# Altium PCB Mosfet_Card.PcbDoc
Units mm, origin at the board's own origin, x right, y up, seen from the top; angles counter-clockwise.
Board outline 46 x 70 mm, 4 copper layers (Top Layer, Layer 1, Layer 2, Bottom Layer), stack 0.603 mm thick; 62 components, 32 nets, 143 pads, 508 vias.
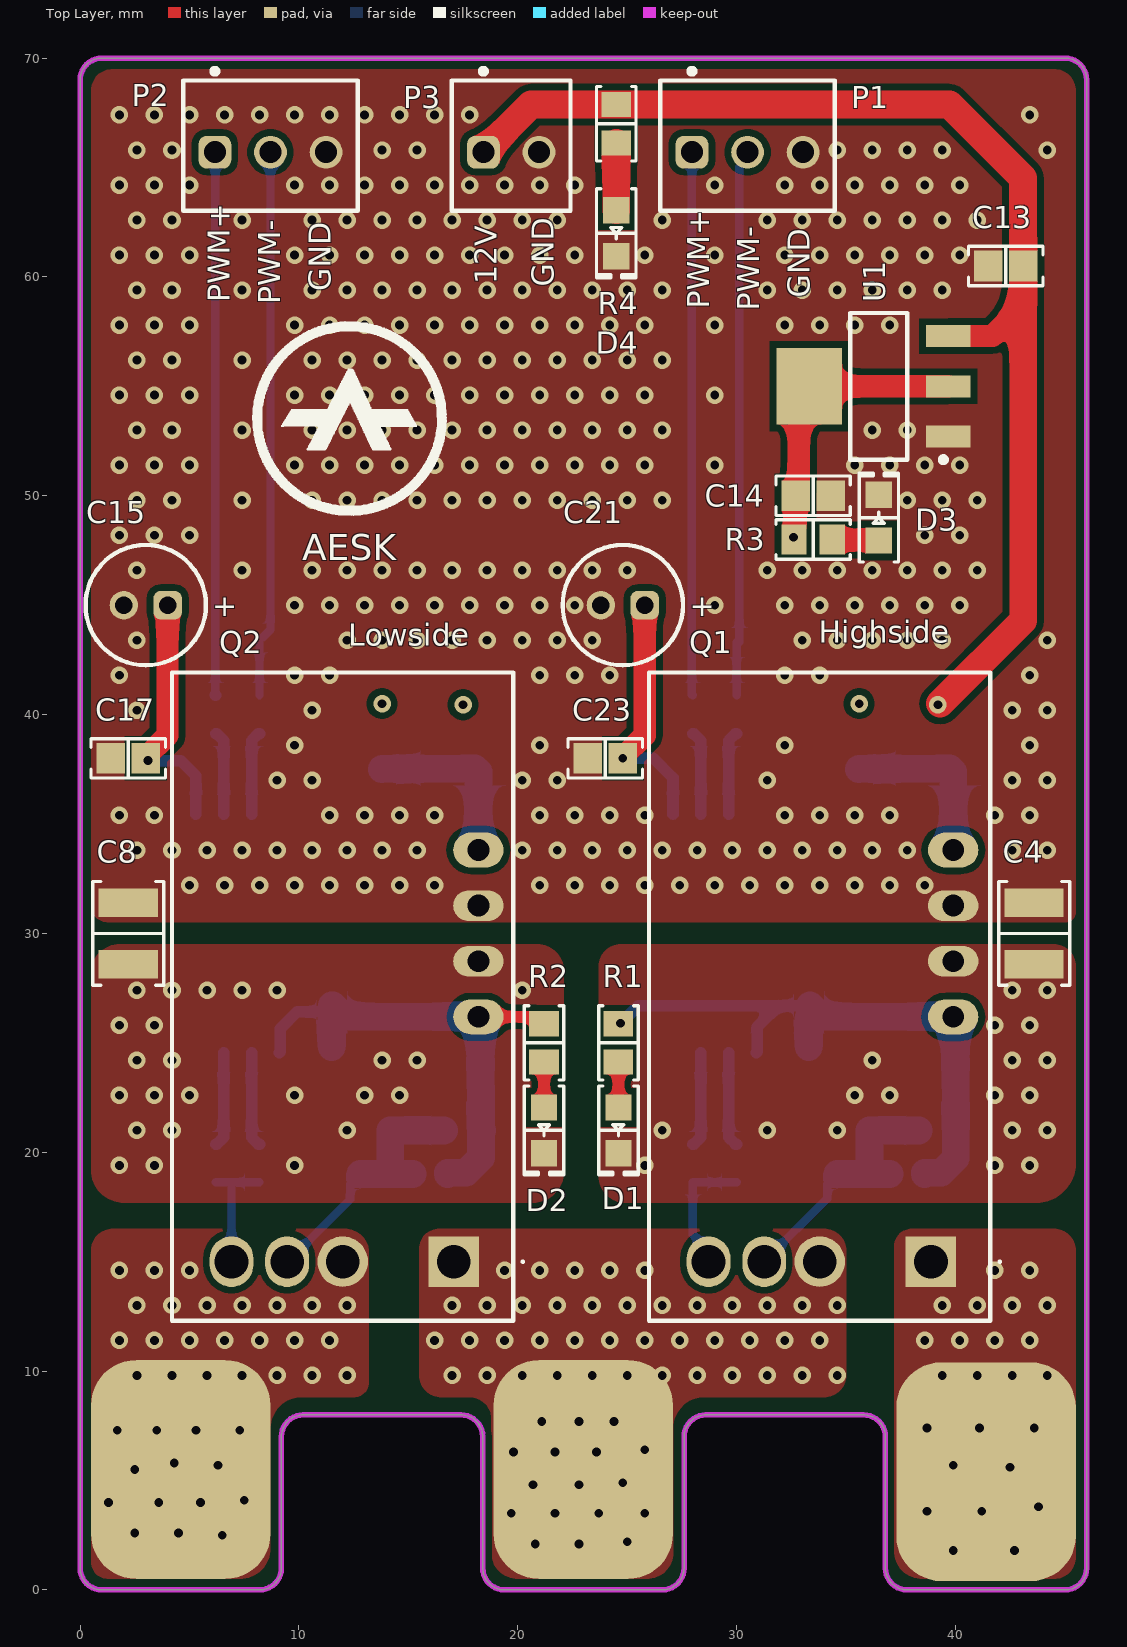
[diagram p0: Top Layer view]
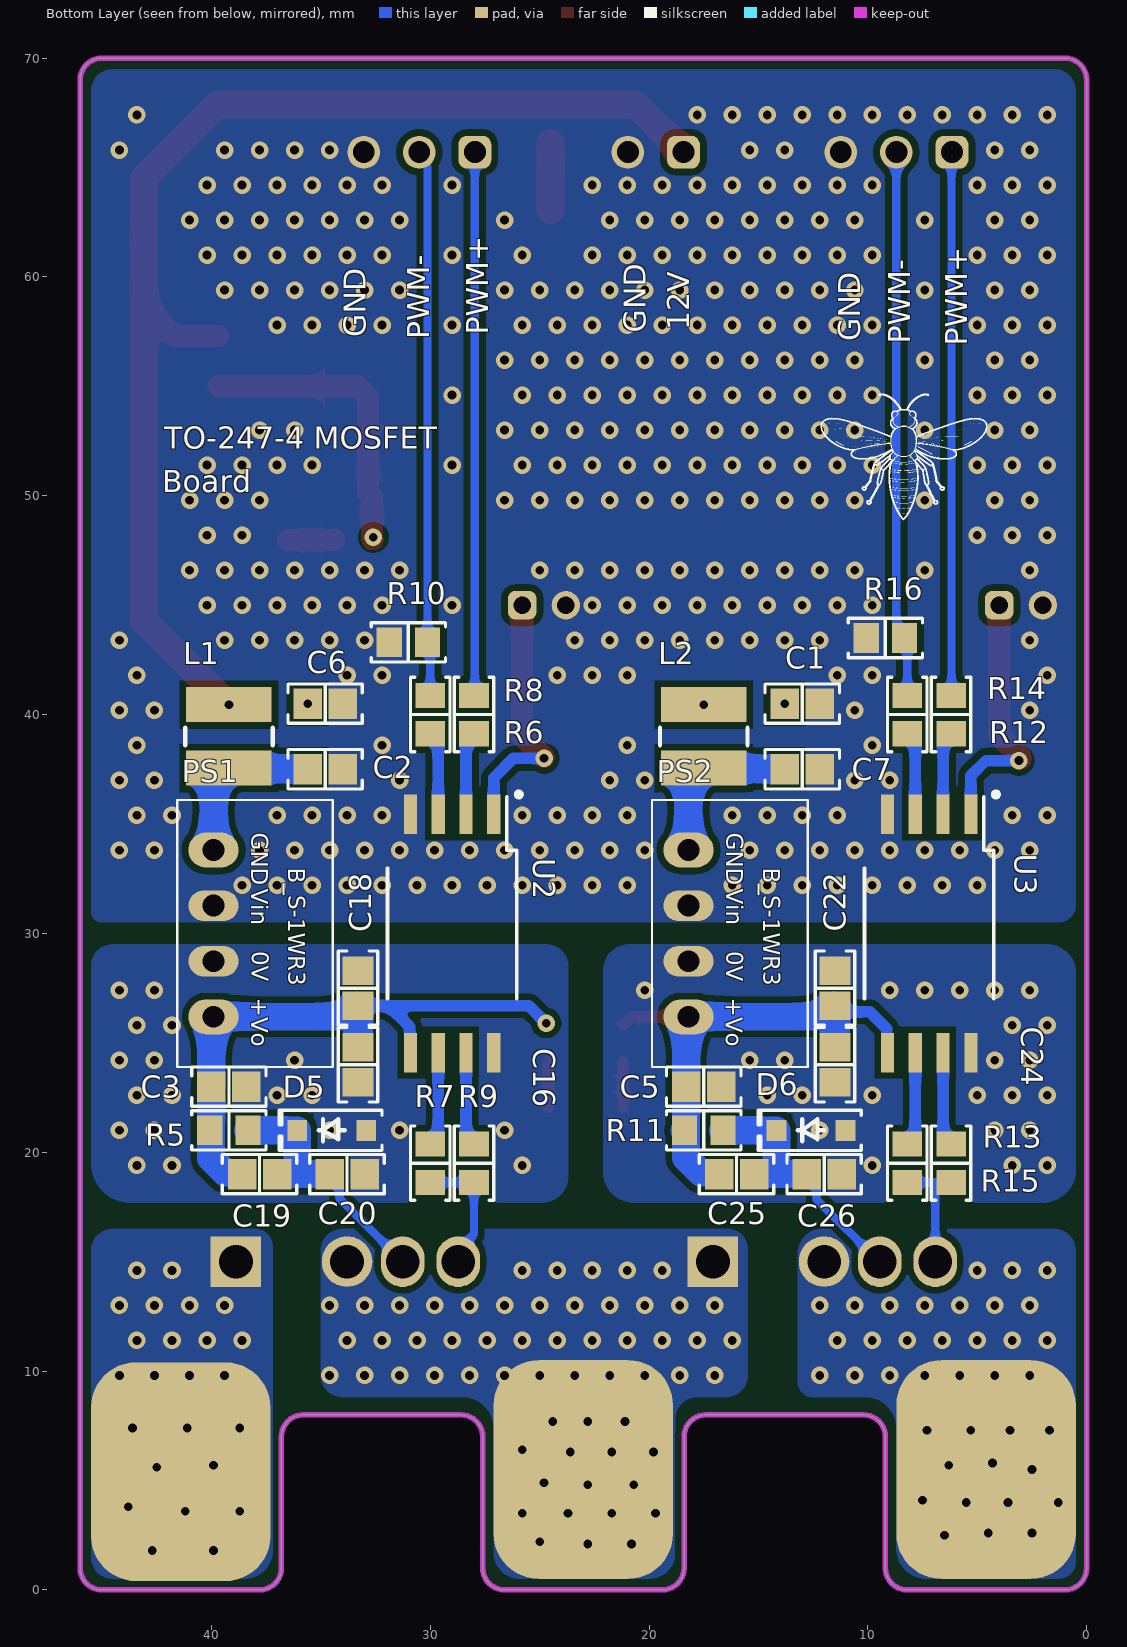
[diagram p1: Bottom Layer view, seen from below]
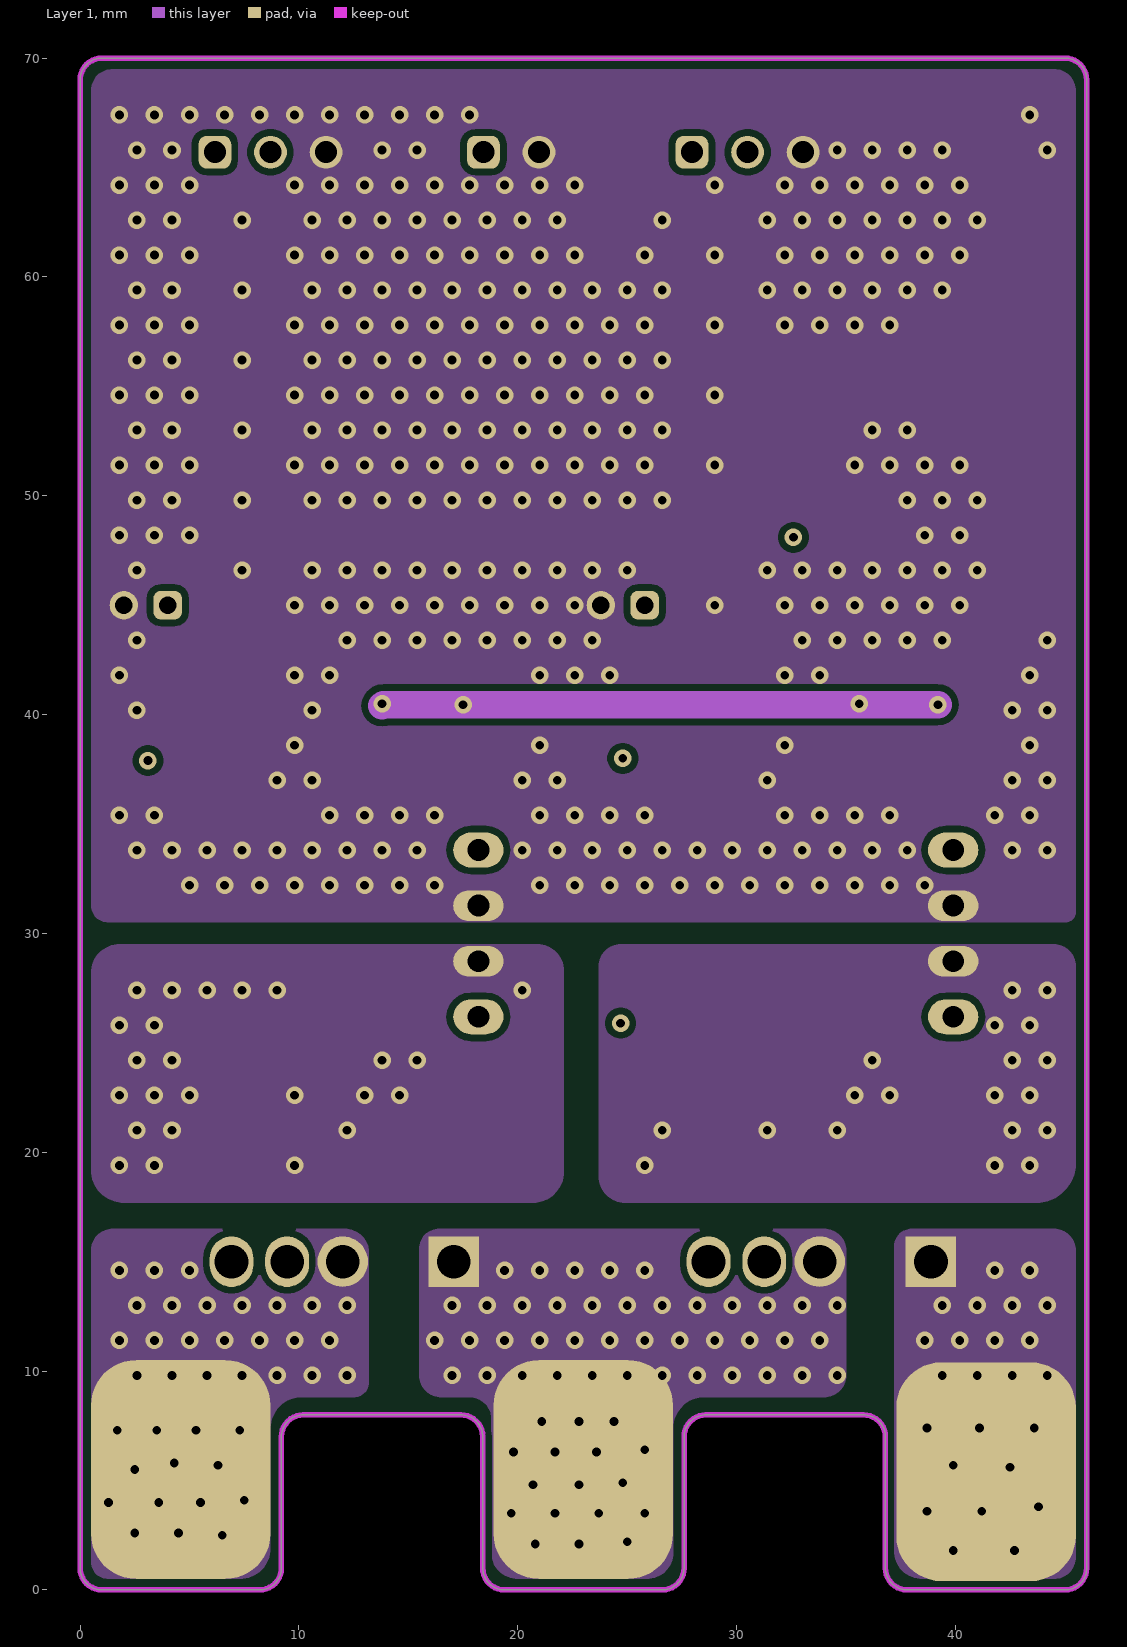
[diagram p2: Layer 1]
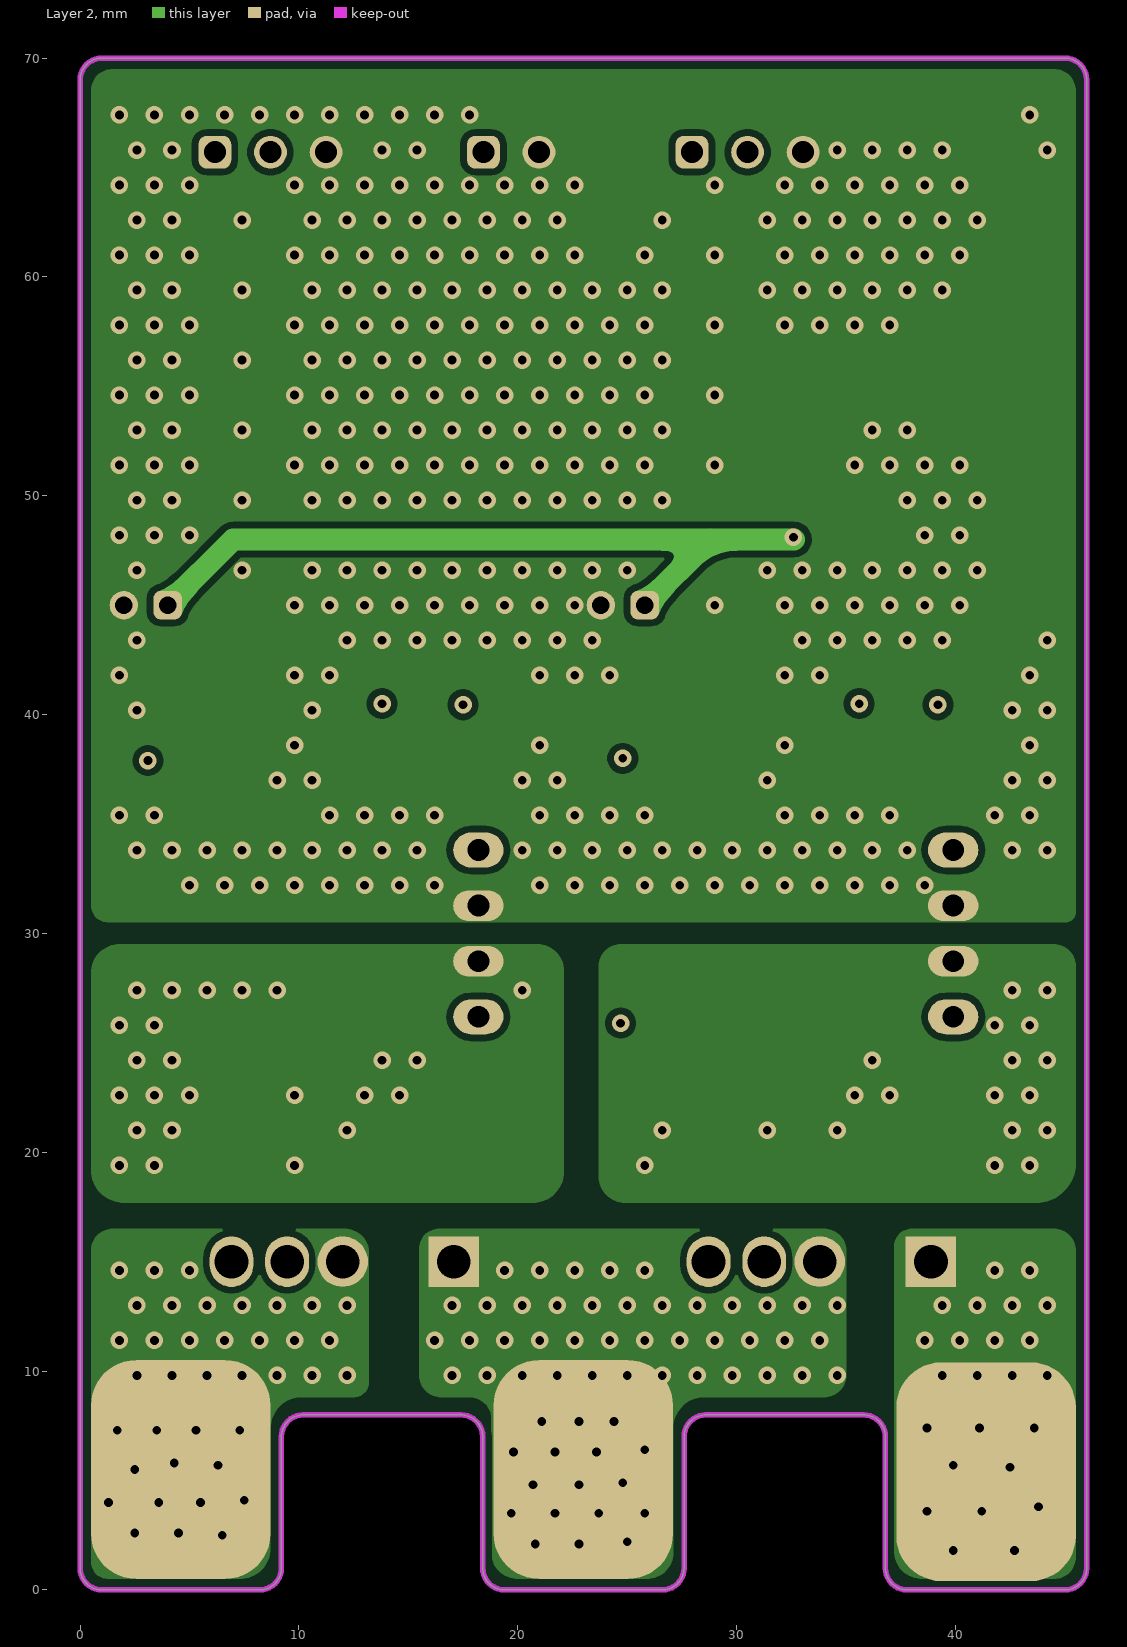
[diagram p3: Layer 2]

## Layer stack, top to bottom
Top Solder: solder mask 0.0102, Solder Resist, Dk 3.5
Top Layer: signal copper 0.0356
Dielectric 2: prepreg 0.0711, PP-006, Dk 4.1
Layer 1: signal copper 0.035
Dielectric 1: dielectric 0.32, FR-4, Dk 4.8
Layer 2: signal copper 0.035
Dielectric 3: prepreg 0.0711, PP-006, Dk 4.1
Bottom Layer: signal copper 0.0356
Bottom Solder: solder mask 0.0102, Solder Resist, Dk 3.5

## Board outline
1,0 8.2,0 ccw(c8.2,1) 9.2,1 9.2,7 cw(c10.2,7) 10.2,8 17.4,8 cw(c17.4,7) 18.4,7 18.4,1 ccw(c19.4,1) 19.4,0 26.6,0 ccw(c26.6,1) 27.6,1 27.6,7 cw(c28.6,7) 28.6,8 35.8,8 cw(c35.8,7) 36.8,7 36.8,1 ccw(c37.8,1) 37.8,0 45,0 ccw(c45,1) 46,1 46,69 ccw(c45,69) 45,70 1,70 ccw(c1,69) 0,69 0,1 ccw(c1,1)

## Design rules (kind name [scope] priority, off if disabled: settings)
BoardOutlineClearance [All] p1: gap=0.2 ignorepadtopadclearanceinfootprint=FALSE
Clearance Clearance_4 [InNet('GNDPWR')] p1: gap=0.3 ignorepadtopadclearanceinfootprint=FALSE
Clearance Clearance_3 [InNet('SW')] p2: gap=0.3 ignorepadtopadclearanceinfootprint=FALSE
Clearance Clearance_2 [InNet('GND_Lowside')] p3: gap=0.3 ignorepadtopadclearanceinfootprint=FALSE
Clearance Clearance_1 [InNet('GND_Highside')] p4: gap=0.3 ignorepadtopadclearanceinfootprint=FALSE
Clearance [InNet('GND')] p5: gap=0.3 ignorepadtopadclearanceinfootprint=FALSE
ComponentClearance [All] p1: gap=0.102 collisioncheckmode=3 verticalgap=0.102 showdistances=TRUE
DiffPairsRouting [All] p1: maxlimit=0.102 minlimit=0.102 mostfreqgap=0.102 toplayer_minwidth=0.102 toplayer_maxwidth=1816.048 toplayer_prefwidth=0.102 midlayer1_minwidth=0.102 midlayer1_maxwidth=1816.048 midlayer1_prefwidth=0.102 midlayer2_minwidth=0.102 midlayer2_maxwidth=1816.048 midlayer2_prefwidth=0.102 bottomlayer_minwidth=0.102 bottomlayer_maxwidth=1816.048 bottomlayer_prefwidth=0.102 maxuncoupledlength=12.7
Height [All] p1: minheight=0 maxheight=1816.048 prefheight=12.7
HoleSize [All] p1: absolutevalues=TRUE maxlimit=6.3 minlimit=0.2 maxpercent=80.000 minpercent=20.000
HoleToHoleClearance [All] p1: gap=0.25 allowstackedmicrovias=FALSE
MinimumAnnularRing [All] p1: minimumring=0.076
MinimumSolderMaskSliver [All] p1: minsoldermaskwidth=0
PlaneClearance [All] p1: clearance=0.102
PlaneConnect PlaneConnectPowerPads [InPadClass('PowerPads')] p1: planeconnectstyle=Direct reliefexpansion=0.508 reliefentries=4 reliefconductorwidth=0.254 reliefairgap=0.254
PlaneConnect [All] p2: pad.planeconnectstyle=Relief pad.reliefexpansion=0.3 pad.reliefentries=4 pad.reliefconductorwidth=0.102 pad.reliefairgap=0.102 via.planeconnectstyle=Direct via.reliefexpansion=0.3 via.reliefentries=4 via.reliefconductorwidth=0.127 via.reliefairgap=0.127
PolygonConnect PolygonConnectPowerPads [All vs (InPadClass('PowerPads'))] p1: connectstyle=Direct reliefconductorwidth=0.254 reliefentries=4 polygonreliefangle="90 Angle" airgapwidth=0.254
PolygonConnect [All] p2: connectstyle=Direct reliefconductorwidth=0.102 reliefentries=4 polygonreliefangle="90 Angle" airgapwidth=0.102
RoutingVias [All] p1: holewidth=0.2 width=0.45 viastyle="Through Hole" minholewidth=0.2 minwidth=0.45 maxholewidth=6.3 maxwidth=6.55
SilkToSilkClearance [All] p1: silktosilkclearance=0
SilkToSolderMaskClearance [IsPad] p1: minsilkscreentomaskgap=0.102 clearancetoexposedcopper=TRUE
SolderMaskExpansion [All] p1: expansion=0.075 istentingtop=FALSE
Width [All] p1: maxlimit=1816.048 minlimit=0.102 preferedwidth=0.102
20 further rules are at their usual default settings.

## Classes and differential pairs
component class U_Power: C1 C2 C3 C4 C5 C6 C7 C8 C13 C14 D1 D2 D3 D4 L1 L2 PS1 PS2 Q1 Q2 R1 R2 R3 R4 U1
component class U_Gate_Drive: C15 C16 C17 C18 C19 C20 C21 C22 C23 C24 C25 C26 D5 D6 R5 R6 R7 R8 R9 R10 R11 R12 R13 R14 R15 R16 U2 U3
component class U_Connector-Harness: H1 H2 MP1 MP2 MP3 MP4 P1 P2 P3

## Components (designator, comment, footprint, x,y, rotation, side; value= is the part's Value field where it differs from the comment)
C1 "4.7 µF" "CAP 0805_2012" 13,40.5 r0 bottom
C2 "4.7 µF" "CAP 0805_2012" 34.8,37.5 r0 bottom
C3 "1 µF" "CAP 0805_2012" 39.2,23 r0 bottom
C4 "1000pF" "CAP 1210_3225 - 1.8MM" 43.6,30 r270 top
C5 "1 µF" "CAP 0805_2012" 17.5,23 r0 bottom
C6 "4.7 µF" "CAP 0805_2012" 34.8,40.5 r0 bottom
C7 "4.7 µF" "CAP 0805_2012" 13,37.5 r0 bottom
C8 "1000pF" "CAP 1210_3225 - 1.8MM" 2.2,30 r270 top
C13 "10 µF" "CAP 0805_2012" 42.3,60.5 r0 top
C14 "100 µF" "CAP 0805_2012" 33.5,50 r180 top
C15 "1uF" WCAP-ATG5_D5H11 3,45 r0 top
C16 "0.22 µF" "CAP 0805_2012" 33.3,24 r270 bottom
C17 "0.1 µF" "CAP 0805_2012" 2.2,38 r180 top
C18 "10 µF" "CAP 0805_2012" 33.3,27.5 r270 bottom
C19 "10 µF" "CAP 0805_2012" 37.8,19 r0 bottom
C20 "4.7 µF" "CAP 0805_2012" 33.8,19 r0 bottom
C21 "1uF" WCAP-ATG5_D5H11 24.8,45 r0 top
C22 "0.22 µF" "CAP 0805_2012" 11.5,27.5 r90 bottom
C23 "0.1 µF" "CAP 0805_2012" 24,38 r180 top
C24 "10 µF" "CAP 0805_2012" 11.5,24 r90 bottom
C25 "10 µF" "CAP 0805_2012" 16,19 r0 bottom
C26 "4.7 µF" "CAP 0805_2012" 12,19 r0 bottom
D1 "Green" "LED 0805_2012 GREEN" 24.6,21 r270 top
D2 "Green" "LED 0805_2012 GREEN" 21.2,21 r270 top
D3 "Green" "LED 0805_2012 GREEN" 36.5,49 r90 top
D4 "Green" "LED 0805_2012 GREEN" 24.5,62 r270 top
D5 "SZMMSZ3V3T1G" SOD-123 34.5,21 r0 bottom
D6 "SZMMSZ3V3T1G" SOD-123 12.6,21 r0 bottom
H1 "TO-247_Heatsink" Heatsink 115.8,137 r0 top
H2 "TO-247_Heatsink" Heatsink 73.9,136.7 r0 top
L1 "6.8 µH" "TDK VLCF4024-2" 39.2,39 r270 bottom
L2 "6.8 µH" "TDK VLCF4024-2" 17.5,39 r270 bottom
MP1 "Hole 3.3mm x 9mm" 78614090960 86.284,113.157 r0 top
MP2 "Hole 3.3mm x 9mm" 78614090960 77.267,113.157 r0 top
MP3 "Hole 3.3mm x 9mm" 78614090960 60.122,113.157 r0 top
MP4 "Hole 3.3mm x 9mm" 78614090960 50.978,113.157 r0 top
P1 "61900311121" 61900311121 30.5,66 r180 top
P2 "61900311121" 61900311121 8.7,66 r180 top
P3 "61900211121" 61900211121 19.7,66 r180 top
PS1 "B_S-1WR3" B_S-1WR3 39.9,30 r270 bottom
PS2 "B_S-1WR3" B_S-1WR3 18.2,30 r270 bottom
Q1 "NTH4L015N065SC1" NTH4L015N065SC1 33.8,15 r0 top
Q2 "NTH4L015N065SC1" NTH4L015N065SC1 12,15 r0 top
R1 "1.2 kOhms" "RES 0805_2012" 24.6,25 r270 top
R2 "1.2 kOhms" "RES 0805_2012" 21.2,25 r270 top
R3 "330 Ohms" "RES 0805_2012" 33.5,48 r0 top
R4 "1 kOhms" "RES 0805_2012" 24.5,67 r90 top
R5 "3.3 kOhms" "RES 0805_2012" 39.2,21 r0 bottom
R6 "56 Ohms" "RES 0805_2012" 28,40 r270 bottom
R7 "10 Ohms" "RES 0805_2012" 30,19.5 r270 bottom
R8 "56 Ohms" "RES 0805_2012" 30,40 r270 bottom
R9 "10 Ohms" "RES 0805_2012" 28,19.5 r270 bottom
R10 "0 Ohms" "RES 0805_2012" 31,43.3 r0 bottom
R11 "3.3 kOhms" "RES 0805_2012" 17.5,21 r0 bottom
R12 "56 Ohms" "RES 0805_2012" 6.2,40 r270 bottom
R13 "10 Ohms" "RES 0805_2012" 8.2,19.5 r270 bottom
R14 "56 Ohms" "RES 0805_2012" 8.2,40 r270 bottom
R15 "10 Ohms" "RES 0805_2012" 6.2,19.5 r270 bottom
R16 "0 Ohms" "RES 0805_2012" 9.2,43.5 r0 bottom
U1 "LM1117IMP-3.3/NOPB" DCY0004A_M 36.5,55 r180 top
U2 "UCC5320SCDWV" DWV0008A 29,30 r270 bottom
U3 "UCC5320SCDWV" DWV0008A 7.2,30 r270 bottom

## Footprints (in the part's own frame and the unit in brackets; to place one, negate y for a bottom-side part, rotate by r counter-clockwise, add the part's x,y. Pads: shape width x height; smd on the part's side, far side on the other; paste and mask are expansions set on the pad)
61900211121 [mm] "2.54mm Male Locking Header, 2p"
  rrect50% 1.5x1.5 hole 1: 1(1.27,0.3)
  round 1.5 hole 1: 2(-1.27,0.3)
  silkscreen extent -2.71,-3.52 2.71,2.98, body extent -2.54,-2.9 2.54,2.9, height 11.53
61900311121 [mm] "2.54mm Male Locking Header, 3p"
  rrect50% 1.5x1.5 hole 1: 1(2.54,0.3)
  round 1.5 hole 1: 2(0,0.3) 3(-2.54,0.3)
  silkscreen extent -3.98,-3.52 3.98,2.98, body extent -3.81,-2.9 3.81,2.9, height 11.53
78614090960 [mm] "SMT Steel Spacer Internal hole diameter 3.3mm non stop, height 9mm"
  round 7.4 / inner round 0 / far side round 0 hole 4.4 unplated: 1(0,0)
  body extent -3,-3 3,3, height 9
B_S-1WR3 [mm]
  oval 1.6x2.3 hole 1: 1(-3.81,0) 4(3.81,0)
  oval 1.4x2.3 hole 1: 2(-1.27,0) 3(1.27,0)
  silkscreen extent -6.1,-1.66 6.1,5.45, body extent -5.81,-0.88 5.79,5.12, height 13.5
"CAP 0805_2012" [mm] "Chip Capacitor, 2-Leads, Body 2.00x1.20mm, IPC Medium Density"
  rect 1.3x1.4 smd: 1(-0.8,0) 2(0.8,0)
  silkscreen extent -1.7,-0.9 1.7,0.9, body extent -1,-0.64 1,0.64, height 1.26
"CAP 1210_3225 - 1.8MM" [mm] "Chip Capacitor, 2-Leads, Body 3.20x2.50mm, IPC Medium Density"
  rect 1.3x2.7 smd: 1(-1.4,0) 2(1.4,0)
  silkscreen extent -2.37,-1.63 2.37,1.63, body extent -1.6,-1.25 1.6,1.25, height 1.8
DCY0004A_M [mm]
  rect 2.05x1 smd paste+0 mask+0.051: 1(-3.175,2.3) 2(-3.175,0) 3(-3.175,-2.3)
  rect 3x3.5 smd paste+0 mask+0.051: 4(3.175,0)
  silkscreen extent -3.08,-3.35 1.3,3.47, body extent -3.5,-3.25 3.5,3.25, height 1.78
DWV0008A [mm]
  rect 1.8x0.6 smd paste+0 mask+0.051: 1(-5.45,1.905) 2(-5.45,0.635) 3(-5.45,-0.635) 4(-5.45,-1.905) 5(5.45,-1.905) 6(5.45,-0.635) 7(5.45,0.635) 8(5.45,1.905)
  silkscreen extent -6.53,-2.95 2.98,3.23, body extent -5.77,-2.93 5.77,2.93, height 2.72
Heatsink [mm]
  body extent -17.6,-3.6 17.6,38, height 11
"LED 0805_2012 GREEN" [mm] "Chip Diode, 2-Leads, Body 2.00x1.25mm, IPC Medium Density"
  rect 1.2x1.2 smd: 1(-1.05,0) 2(1.05,0)
  silkscreen extent -2.03,-0.9 2.03,0.9, body extent -1,-0.62 1,0.63, height 0.9
NTH4L015N065SC1 [mm]
  rect 2.31x2.31 hole 1.54: 1(5.08,0)
  round 2.31 hole 1.54: 2(0,0)
  oval 2x2.31 hole 1.54: 3(-2.54,0) 4(-5.08,0)
  silkscreen extent -7.8,-2.7 8.28,26.92, body extent -7.9,-0.25 7.9,26.87, height 5.7
"RES 0805_2012" [mm] "Chip Resistor, 2-Leads, Body 2.00x1.25mm, IPC Medium Density"
  rect 1.15x1.35 smd: 1(-0.875,0) 2(0.875,0)
  silkscreen extent -1.7,-0.9 1.7,0.9, body extent -1,-0.62 1,0.63, height 0.6
SOD-123 [mm] "SOD, 2-Leads, Body 1.55x3.70mm, IPC Medium Density"
  rect 0.9x0.95 smd: 1(-1.575,0) 2(1.575,0)
  silkscreen extent -2.3,-0.92 2.41,0.92, body extent -1.86,-0.78 1.86,0.77, height 1.35
"TDK VLCF4024-2" [mm] "Precision Wire Wound Inductor, 2-Leads, Body 4.00x4.00mm, IPC Medium Density"
  rect 1.6x3.9 smd: 1(-1.45,0) 2(1.45,0)
  silkscreen extent -0.4,-2 0.4,2, body extent -2.05,-2 2.05,2, height 2.4
WCAP-ATG5_D5H11 [mm] "Aluminum Electrolytic Capacitors, 5x11mm"
  rrect50% 1.3x1.3 hole 0.8: 1(1,0)
  round 1.3 hole 0.8: 2(-1,0)
  silkscreen extent -2.75,-2.75 2.75,2.75, body extent -2.49,-2.5 2.5,2.5, height 11.31

## Part data
C1 C2 C6 C7 C20 C26: library part VJ0805V475ZXQTW1BC, "CAP CER 4.7UF 10V Y5V 0805", Device Package="0805 (2012 Metric)", manufacturer="Vishay Vitramon", Operating Temperature="-25°C ~ 85°C", Supplier Part Number 1=720-1738-1-ND, Temperature Coefficient="Y5V (F)", Tolerance="-20%, +80%", Voltage - Rated=10V, Applications="General Purpose", Capacitance="4.7 µF", componentlink1description=Datasheet, componentlink1url=https://www.vishay.com/docs/28548/vjw1bcbascomseries.pdf, componentlink2description="DigiKey Link", componentlink2url=https://www.digikey.com/en/products/detail/vishay-vitramon/VJ0805V475ZXQTW1BC/8310746, lastupdated="9.02.2024 20:15:54", Lifecycle Status=Active, Minimum Order=1, Mounting Type="Surface Mount, MLCC", Package / Case="0805 (2012 Metric)", packaging=TapeAndReel, Part Number=VJ0805V475ZXQTW1BC, Part Status=Active, partid=7977, price=0.06, series=VJ, Size / Dimension="0.079\" L x 0.049\" W (2.00mm x 1.25mm)", Supplier 1=DigiKey, Thickness (Max)="0.053\" (1.35mm)"
C3 C5: library part VJ0805Y105KXXTW1BC, "CAP CER 1UF 25V X7R 0805", Device Package="0805 (2012 Metric)", manufacturer="Vishay Vitramon", Operating Temperature="-55°C ~ 125°C", Supplier Part Number 1=720-VJ0805Y105KXXTW1BCCT-ND, Temperature Coefficient=X7R, Tolerance=±10%, Voltage - Rated=25V, Applications="General Purpose", Capacitance="1 µF", componentlink1description=Datasheet, componentlink1url=http://www.vishay.com/docs/28548/vjw1bcbascomseries.pdf, componentlink2description="DigiKey Link", componentlink2url=https://www.digikey.com/en/products/detail/vishay-vitramon/VJ0805Y105KXXTW1BC/9681488, lastupdated="9.02.2024 20:15:32", Lifecycle Status=Active, Minimum Order=1, Mounting Type="Surface Mount, MLCC", Package / Case="0805 (2012 Metric)", packaging=TapeAndReel, Part Number=VJ0805Y105KXXTW1BC, Part Status=Active, partid=15348, price=0.02, series="VJ W1BC", Size / Dimension="0.079\" L x 0.049\" W (2.00mm x 1.25mm)", Supplier 1=DigiKey, Thickness (Max)="0.053\" (1.35mm)"
C4 C8: library part 1210GC102MAT1A, "CAP CER 1000PF 2KV X7R 1210", Device Package="1210 (3225 Metric)", manufacturer="AVX Corporation", Operating Temperature="-55°C ~ 125°C", Supplier Part Number 1=478-5184-1-ND, Temperature Coefficient=X7R, Tolerance=±20%, Voltage - Rated="2000V (2kV)", Applications="General Purpose", Capacitance=1000pF, componentlink1description=Datasheet, componentlink1url=http://datasheets.avx.com/AVX-HV_MLCC.pdf, componentlink2description="DigiKey Link", componentlink2url=http://digikey.com/product-detail/en/avx-corporation/1210GC102MAT1A/478-5184-1-ND/1913274, Features="High Voltage", lastupdated="2.09.2020 01:10:35", Lifecycle Status=Active, Minimum Order=1, Mounting Type="Surface Mount, MLCC", Package / Case="1210 (3225 Metric)", packaging=TapeAndReel, Part Number=1210GC102MAT1A, Part Status=Active, partid=24774, price=0.30, series=-, Size / Dimension="0.130\" L x 0.098\" W (3.30mm x 2.50mm)", Supplier 1=DigiKey, Thickness (Max)="0.071\" (1.80mm)"
C13 C18 C19 C24 C25: library part TMK212BC6106MG-T, "CAP CER 10UF 25V X6S 0805", Device Package="0805 (2012 Metric)", manufacturer="Taiyo Yuden", Operating Temperature="-55°C ~ 105°C", Supplier Part Number 1=587-TMK212BC6106MG-TCT-ND, Temperature Coefficient=X6S, Tolerance=±20%, Voltage - Rated=25V, Applications="SMPS Filtering", Capacitance="10 µF", componentlink1description=Datasheet, componentlink1url=https://ds.yuden.co.jp/TYCOMPAS/ut/detail?pn=TMK212BC6106MG-T&u=M, componentlink2description="DigiKey Link", componentlink2url=https://www.digikey.com/en/products/detail/taiyo-yuden/TMK212BC6106MG-T/11675671, lastupdated="9.02.2024 20:15:02", Lifecycle Status=Active, Minimum Order=1, Mounting Type="Surface Mount, MLCC", Package / Case="0805 (2012 Metric)", packaging=TapeAndReel, Part Number=TMK212BC6106MG-T, Part Status=Active, partid=31493, price=0.17, series=M, Size / Dimension="0.079\" L x 0.049\" W (2.00mm x 1.25mm)", Supplier 1=DigiKey, Thickness (Max)="0.057\" (1.45mm)"
C14: library part MSASJ21GBB5107MTCA01, "CAP CER 100UF 6.3V X5R 0805", Device Package="0805 (2012 Metric)", manufacturer="Taiyo Yuden", Operating Temperature="-55°C ~ 85°C", Supplier Part Number 1=587-MSASJ21GBB5107MTCA01TR-ND, Temperature Coefficient=X5R, Tolerance=±20%, Voltage - Rated=6.3V, Applications="SMPS Filtering", Capacitance="100 µF", componentlink2description="DigiKey Link", componentlink2url=https://www.digikey.com/en/products/detail/taiyo-yuden/MSASJ21GBB5107MTCA01/16664806, lastupdated="9.02.2024 20:14:44", Lifecycle Status=Active, Minimum Order=3000, Mounting Type="Surface Mount, MLCC", Package / Case="0805 (2012 Metric)", packaging=TapeAndReel, Part Number=MSASJ21GBB5107MTCA01, Part Status=Active, partid=48730, price=0.52, series=MSAS, Size / Dimension="0.079\" L x 0.049\" W (2.00mm x 1.25mm)", Supplier 1=DigiKey, Thickness (Max)="0.057\" (1.45mm)"
C15 C21: library part 860020672005, "WCAP-ATG5 Aluminum Electrolytic Capacitor, Radial, THT, D5 x H11mm, 1µF, 50V", Capacitance Tolerance=+/-20%, Leakage Current=3uA, manufacturer="Wurth Elektronik", Operating Temperature Max=105°C, Operating Temperature Min=-40°C, Rated Voltage (DC)=50V, Ripple Current=13mA, Capacitance=1uF, Category="Aluminum Electrolytic Capacitors", componentlink1description="Website Link", componentlink1url=https://www.we-online.com/redexpert/article/860020672005?ad, componentlink2description="Datasheet Link", componentlink2url=https://www.we-online.com/redexpert/spec/860020672005?ad, Diameter=5mm, Dissipation Factor=10%, Endurance=2000h, Height=11mm, Manufacturer Part Number=860020672005, Match Code=WCAP-ATG5, Mount="Through Hole", packaging="Ammo Pack", Technical Reference=ATDC110010M050DSPA3B000, Simulation ModelName=860020672005_1uF, Simulation PortMap=(1:1),(2:2)
C16 C22: library part VJ0805Y224KXXTW1BC, "CAP CER 0.22UF 25V X7R 0805", Device Package="0805 (2012 Metric)", manufacturer="Vishay Vitramon", Operating Temperature="-55°C ~ 125°C", Supplier Part Number 1=720-VJ0805Y224KXXTW1BCCT-ND, Temperature Coefficient=X7R, Tolerance=±10%, Voltage - Rated=25V, Applications="General Purpose", Capacitance="0.22 µF", componentlink1description=Datasheet, componentlink1url=https://www.vishay.com/docs/28548/vjw1bcbascomseries.pdf, componentlink2description="DigiKey Link", componentlink2url=https://www.digikey.com/en/products/detail/vishay-vitramon/VJ0805Y224KXXTW1BC/8312077, lastupdated="9.02.2024 20:15:18", Lifecycle Status=Active, Minimum Order=1, Mounting Type="Surface Mount, MLCC", Package / Case="0805 (2012 Metric)", packaging=TapeAndReel, Part Number=VJ0805Y224KXXTW1BC, Part Status=Active, partid=26430, price=0.04, series="VJ W1BC", Size / Dimension="0.079\" L x 0.049\" W (2.00mm x 1.25mm)", Supplier 1=DigiKey, Thickness (Max)="0.053\" (1.35mm)"
C17 C23: library part VJ0805Y104MXAMR, "CAP CER 0.1UF 50V X7R 0805", Device Package="0805 (2012 Metric)", manufacturer="Vishay Vitramon", Operating Temperature="-55°C ~ 150°C", Supplier Part Number 1=720-1755-1-ND, Temperature Coefficient=X7R, Tolerance=±20%, Voltage - Rated=50V, Applications="General Purpose", Capacitance="0.1 µF", componentlink1description=Datasheet, componentlink1url=http://www.vishay.com/docs/45199/vjcommercialseries.pdf, componentlink2description="DigiKey Link", componentlink2url=https://www.digikey.com/en/products/detail/vishay-vitramon/VJ0805Y104MXAMR/8311084, lastupdated="9.02.2024 20:15:36", Lifecycle Status=Active, Minimum Order=1, Mounting Type="Surface Mount, MLCC", Package / Case="0805 (2012 Metric)", packaging=TapeAndReel, Part Number=VJ0805Y104MXAMR, Part Status=Active, partid=14439, price=0.09, series=VJ, Size / Dimension="0.079\" L x 0.049\" W (2.00mm x 1.25mm)", Supplier 1=DigiKey, Thickness (Max)="0.057\" (1.45mm)"
D1 D2 D3 D4: library part HSMQ-C170, "LED GREEN DIFFUSED CHIP SMD", Current - Test=20mA, Device Package="0805 (2012 Metric)", Lens Color=White, manufacturer="Broadcom Limited", Millicandela Rating=145mcd, Supplier Device Package="Chip LED", Supplier Part Number 1=516-3071-1-ND, Voltage - Forward (Vf) (Typ)=3.4V, Color=Green, componentlink1description=Datasheet, componentlink1url=https://docs.broadcom.com/docs/AV02-0977EN, componentlink2description="DigiKey Link", componentlink2url=https://www.digikey.com/en/products/detail/broadcom-limited/HSMQ-C170/1235197, Configuration=Standard, Height (Max)=0.80mm, lastupdated="3.06.2024 20:00:29", Lens Size="1.40mm x 1.25mm", Lens Style="Rectangle with Flat Top", Lens Transparency=Diffused, Lifecycle Status=Active, Minimum Order=1, Mounting Type="Surface Mount", Package / Case="0805 (2012 Metric)", packaging=TapeAndReel, Part Number=HSMQ-C170, Part Status=Active, partid=256, price=0.38, series=-, Size / Dimension="2.00mm L x 1.25mm W", Supplier 1=DigiKey, Viewing Angle=140°, Wavelength - Dominant=527nm, Wavelength - Peak=520nm
D5 D6: "DIODE ZENER 3.3V 500MW SOD123", Current - Reverse Leakage @ Vr="5µA @ 1V", manufacturer="ON Semiconductor", Operating Temperature="-55°C ~ 150°C", Package / Case=SOD-123, Power - Max=500mW, Supplier Part Number 1=SZMMSZ3V3T1GOSCT-ND, Tolerance=±5%, Voltage - Forward (Vf) (Max) @ If="900mV @ 10mA", Voltage - Zener (Nom) (Vz)=3.3V, componentlink1description=Datasheet, componentlink1url=http://www.onsemi.com/pub/Collateral/MMSZ2V4T1-D.PDF, componentlink2description="DigiKey Link", componentlink2url=http://digikey.com/product-detail/en/on-semiconductor/SZMMSZ3V3T1G/SZMMSZ3V3T1GOSCT-ND/9087911, lastupdated="3.06.2024 19:55:41", Lifecycle Status=Active, Minimum Order=1, Mounting Type="Surface Mount", packaging=TapeAndReel, Part Number=SZMMSZ3V3T1G, Part Status=Active, partid=2464, price=0.05, series="Automotive, AEC-Q101", Supplier 1=DigiKey, Supplier Device Package=SOD-123, Impedance (Max) (Zzt)="95 Ohms"
L1 L2: library part VLCF4024T-6R8N1R1-2, "FIXED IND 6.8UH 1.15A 116MOHM SM", Current - Saturation=1.15A, Current Rating (Amps)="1.15 A", DC Resistance (DCR)="116mOhm Max", Device Package=Nonstandard, manufacturer="TDK Corporation", Operating Temperature="-40°C ~ 105°C", Supplier Part Number 1=445-8738-1-ND, Tolerance=±30%, Inductance Frequency - Test="100 kHz", componentlink1description=Datasheet, componentlink1url=https://product.tdk.com/info/en/catalog/datasheets/inductor_commercial_power_vlcf4024-2_en.pdf?ref_disty=digikey, componentlink2description="DigiKey Link", componentlink2url=https://www.digikey.com/en/products/detail/tdk-corporation/VLCF4024T-6R8N1R1-2/3083280, Height - Seated (Max)="0.094\" (2.40mm)", lastupdated="3.06.2024 20:02:43", Lifecycle Status=Active, Material - Core=Ferrite, Minimum Order=1, Mounting Type="Surface Mount", Package / Case=Nonstandard, packaging=TapeAndReel, Part Number=VLCF4024T-6R8N1R1-2, Part Status=Active, partid=160, price=0.30, series=VLCF, Shielding=Shielded, Size / Dimension="0.157\" L x 0.157\" W (4.00mm x 4.00mm)", Supplier 1=DigiKey, Type="Drum Core, Wirewound", Inductance="6.8 µH"
MP1 MP2 MP3 MP4: library part 78614090960, "WA-SMSA SMT Spacer Studs Automotive, OD 6mm, ID 4.2mm, Hole 3.3mm x 9mm", manufacturer="Wurth Elektronik", Operating Temperature Max=150°C, Operating Temperature Min=-55°C, Automotive=Yes, Category="SMT Spacers", componentlink1description="Website Link", componentlink1url=https://www.we-online.com/redexpert/article/78614090960?ad, componentlink2description="Datasheet Link", componentlink2url=https://www.we-online.com/redexpert/spec/78614090960?ad, Height=9mm, Hole Diameter=3.3mm, Manufacturer Part Number=78614090960, Match Code=WA-SMSA, Material=Steel, Mount="Surface Mount", Outside Diameter=6mm, packaging="Tape and Reel", Solder Cream Thickness Min=150um, Surface=Tin, Inside Diameter=4.2mm
P1 P2: "WR-WTB THT Male Vertical Locking Header, pitch 2.54mm, 3pins", Contact Resistance=20mOhm, manufacturer="Wurth Elektronik", Operating Temperature Max=105°C, Operating Temperature Min=-40°C, Rated Current=3A, Withstanding Voltage=1000VAC, Working Voltage=250VAC, Category="Wire-to-Board Connectors", componentlink1description="Website Link", componentlink1url=https://www.we-online.com/redexpert/article/61900311121?ad, componentlink2description="Datasheet Link", componentlink2url=https://www.we-online.com/redexpert/spec/61900311121?ad, Gender=Male, Height=11.5mm, Length=7.62mm, Manufacturer Part Number=61900311121, Match Code=WR-WTB, Mount="Through Hole", Number of Pins=3, Number of Rows=1, Orientation=Vertical, packaging=Bag, Pitch=2.54mm, Width=5.8mm
P3: "WR-WTB THT Male Vertical Locking Header, pitch 2.54mm, 2pins", Contact Resistance=20mOhm, manufacturer="Wurth Elektronik", Operating Temperature Max=105°C, Operating Temperature Min=-40°C, Rated Current=3A, Withstanding Voltage=1000VAC, Working Voltage=250VAC, Category="Wire-to-Board Connectors", componentlink1description="Website Link", componentlink1url=https://www.we-online.com/redexpert/article/61900211121?ad, componentlink2description="Datasheet Link", componentlink2url=https://www.we-online.com/redexpert/spec/61900211121?ad, Gender=Male, Height=11.5mm, Length=5.08mm, Manufacturer Part Number=61900211121, Match Code=WR-WTB, Mount="Through Hole", Number of Pins=2, Number of Rows=1, Orientation=Vertical, packaging=Bag, Pitch=2.54mm, Width=5.8mm
Q1 Q2: "Max RDS(on) = 18.7 m at Vgs = 18V, Id = 60A; High Junction Temperature; 100% UIL Tested; RoHS Compliant; High Speed Switching and Low Capacitance; 650V rated", Manufacturer_Name=onsemi, Mouser Part Number=863-NTH4L015N065SC1, Arrow Part Number=NTH4L015N065SC1, Arrow Price/Stock=https://www.arrow.com/en/products/nth4l015n065sc1/on-semiconductor?region=nac, Datasheet Link=https://www.onsemi.com/pub/Collateral/NTH4L015N065SC1-D.PDF, Geometry.Height=25.56mm, Manufacturer_Part_Number=NTH4L015N065SC1, Mouser Price/Stock=https://www.mouser.co.uk/ProductDetail/onsemi/NTH4L015N065SC1?qs=stqOd1AaK7%252BX4HlQwOMOTg%3D%3D
R1 R2: library part CPF0805B1K2E1, "RES SMD 1.2K OHM 0.1% 1/10W 0805", Device Package="0805 (2012 Metric)", manufacturer="TE Connectivity Passive Product", Operating Temperature="-55°C ~ 155°C", Power (Watts)="0.1W, 1/10W", Supplier Device Package=0805, Supplier Part Number 1=A103167CT-ND, Temperature Coefficient=±25ppm/°C, Tolerance=±0.1%, componentlink1description=Datasheet, componentlink1url=https://www.te.com/commerce/DocumentDelivery/DDEController?Action=srchrtrv&DocNm=1773200&DocType=DS&DocLang=English, componentlink2description="DigiKey Link", componentlink2url=https://www.digikey.com/en/products/detail/te-connectivity-passive-product/CPF0805B1K2E1/2382033, Composition="Thin Film", Height - Seated (Max)="0.026\" (0.65mm)", lastupdated="8.02.2024 21:00:58", Lifecycle Status=Active, Minimum Order=1, Number of Terminations=2, Package / Case="0805 (2012 Metric)", packaging=TapeAndReel, Part Number=CPF0805B1K2E1, Part Status=Active, partid=48602, price=0.12, Resistance="1.2 kOhms", series="CPF, Neohm", Size / Dimension="0.079\" L x 0.049\" W (2.00mm x 1.25mm)", Supplier 1=DigiKey
R3: library part CPF0805B330RE1, "RES SMD 330 OHM 0.1% 1/10W 0805", Device Package="0805 (2012 Metric)", manufacturer="TE Connectivity Passive Product", Operating Temperature="-55°C ~ 155°C", Power (Watts)="0.1W, 1/10W", Supplier Device Package=0805, Supplier Part Number 1=A103195CT-ND, Temperature Coefficient=±25ppm/°C, Tolerance=±0.1%, componentlink1description=Datasheet, componentlink1url=https://www.te.com/commerce/DocumentDelivery/DDEController?Action=srchrtrv&DocNm=1773200&DocType=DS&DocLang=English, componentlink2description="DigiKey Link", componentlink2url=https://www.digikey.com/en/products/detail/te-connectivity-passive-product/CPF0805B330RE1/2382020, Composition="Thin Film", Height - Seated (Max)="0.026\" (0.65mm)", lastupdated="8.02.2024 21:01:14", Lifecycle Status=Active, Minimum Order=1, Number of Terminations=2, Package / Case="0805 (2012 Metric)", packaging=TapeAndReel, Part Number=CPF0805B330RE1, Part Status=Active, partid=46733, price=0.12, Resistance="330 Ohms", series="CPF, Neohm", Size / Dimension="0.079\" L x 0.049\" W (2.00mm x 1.25mm)", Supplier 1=DigiKey
R4: library part 1-2176092-8, "RES SMD 1K OHM 0.1% 1/4W 0805", Device Package="0805 (2012 Metric)", manufacturer="TE Connectivity Passive Product", Operating Temperature="-55°C ~ 155°C", Power (Watts)="0.25W, 1/4W", Supplier Device Package=0805, Supplier Part Number 1=A110543CT-ND, Temperature Coefficient=±25ppm/°C, Tolerance=±0.1%, componentlink1description=Datasheet, componentlink1url=https://www.te.com/commerce/DocumentDelivery/DDEController?Action=srchrtrv&DocNm=1773272&DocType=DS&DocLang=English, componentlink2description="DigiKey Link", componentlink2url=https://www.digikey.com/en/products/detail/te-connectivity-passive-product/1-2176092-8/4034011, Composition="Thin Film", Height - Seated (Max)="0.026\" (0.65mm)", lastupdated="8.02.2024 21:02:35", Lifecycle Status=Active, Minimum Order=1, Number of Terminations=2, Package / Case="0805 (2012 Metric)", packaging=TapeAndReel, Part Number=1-2176092-8, Part Status=Active, partid=28484, price=0.14, Resistance="1 kOhms", series="RP73P, Holsworthy", Size / Dimension="0.079\" L x 0.049\" W (2.00mm x 1.25mm)", Supplier 1=DigiKey
R5 R11: library part CPF0805B3K3E1, "RES SMD 3.3K OHM 0.1% 1/10W 0805", Device Package="0805 (2012 Metric)", manufacturer="TE Connectivity Passive Product", Operating Temperature="-55°C ~ 155°C", Power (Watts)="0.1W, 1/10W", Supplier Device Package=0805, Supplier Part Number 1=A102339CT-ND, Temperature Coefficient=±25ppm/°C, Tolerance=±0.1%, componentlink1description=Datasheet, componentlink1url=https://www.te.com/commerce/DocumentDelivery/DDEController?Action=srchrtrv&DocNm=1773200&DocType=DS&DocLang=English, componentlink2description="DigiKey Link", componentlink2url=https://www.digikey.com/en/products/detail/te-connectivity-passive-product/CPF0805B3K3E1/2389807, Composition="Thin Film", Height - Seated (Max)="0.026\" (0.65mm)", lastupdated="8.02.2024 21:02:11", Lifecycle Status=Active, Minimum Order=1, Number of Terminations=2, Package / Case="0805 (2012 Metric)", packaging=TapeAndReel, Part Number=CPF0805B3K3E1, Part Status=Active, partid=34198, price=0.12, Resistance="3.3 kOhms", series="CPF, Neohm", Size / Dimension="0.079\" L x 0.049\" W (2.00mm x 1.25mm)", Supplier 1=DigiKey
R6 R8 R12 R14: library part 3430A2F56RTDF, "3430 A2 1% 56R 100PPM 1K RL", Device Package="0805 (2012 Metric)", manufacturer="TE Connectivity Passive Product", Operating Temperature="-55°C ~ 155°C", Power (Watts)=1W, Ratings=AEC-Q200, Supplier Device Package=0508, Supplier Part Number 1=1712-3430A2F56RTDFCT-ND, Temperature Coefficient=±100ppm/°C, Tolerance=±1%, componentlink2description="DigiKey Link", componentlink2url=https://www.digikey.com/en/products/detail/te-connectivity-passive-product/3430A2F56RTDF/17763508, Composition="Thick Film", Features="Automotive AEC-Q200", Height - Seated (Max)="0.026\" (0.65mm)", lastupdated="8.02.2024 21:00:05", Lifecycle Status=Active, Minimum Order=1, Number of Terminations=2, Package / Case="0805 (2012 Metric)", packaging=TapeAndReel, Part Number=3430A2F56RTDF, Part Status=Active, partid=77356, price=0.02, Resistance="56 Ohms", series=3430, Size / Dimension="0.049\" L x 0.079\" W (1.25mm x 2.00mm)", Supplier 1=DigiKey
R7 R9 R13 R15: library part 3430A2F10RTDF, "3430 A2 1% 10R 100PPM 1K RL", Device Package="0805 (2012 Metric)", manufacturer="TE Connectivity Passive Product", Operating Temperature="-55°C ~ 155°C", Power (Watts)=1W, Ratings=AEC-Q200, Supplier Device Package=0508, Supplier Part Number 1=1712-3430A2F10RTDFCT-ND, Temperature Coefficient=±100ppm/°C, Tolerance=±1%, componentlink2description="DigiKey Link", componentlink2url=https://www.digikey.com/en/products/detail/te-connectivity-passive-product/3430A2F10RTDF/17763496, Composition="Thick Film", Features="Automotive AEC-Q200", Height - Seated (Max)="0.026\" (0.65mm)", lastupdated="8.02.2024 21:00:12", Lifecycle Status=Active, Minimum Order=1, Number of Terminations=2, Package / Case="0805 (2012 Metric)", packaging=TapeAndReel, Part Number=3430A2F10RTDF, Part Status=Active, partid=76305, price=0.02, Resistance="10 Ohms", series=3430, Size / Dimension="0.049\" L x 0.079\" W (1.25mm x 2.00mm)", Supplier 1=DigiKey
R10 R16: library part 5106, "RES SMD 0 OHM JUMPER 1/2W 0805", Device Package="0805 (2012 Metric)", manufacturer="Keystone Electronics", Power (Watts)="0.5W, 1/2W", Supplier Device Package=0805, Supplier Part Number 1=36-5106CT-ND, Tolerance=Jumper, componentlink1description=Datasheet, componentlink1url=http://keyelco.com/userAssets/file/M65p54.pdf, componentlink2description="DigiKey Link", componentlink2url=https://www.digikey.com/en/products/detail/keystone-electronics/5106/5118868, Composition="Metal Element", Height - Seated (Max)="0.028\" (0.71mm)", lastupdated="8.02.2024 21:01:27", Lifecycle Status=Active, Minimum Order=1, Number of Terminations=2, Package / Case="0805 (2012 Metric)", packaging=TapeAndReel, Part Number=5106, Part Status=Active, partid=44373, price=0.16, Resistance="0 Ohms", series=-, Size / Dimension="0.079\" L x 0.049\" W (2.00mm x 1.25mm)", Supplier 1=DigiKey
U1: library part LM1117IMP-3.3NOPB, "800-mA 15-V linear voltage regulator 4-SOT-223 -40 to 125", Manufacturer_Name="Texas Instruments", Copyright="Copyright (C) 2025 Ultra Librarian. All rights reserved.", Datasheet=https://www.ti.com/lit/gpn/lm1117, Manufacturer_Part_Number=LM1117IMP-3.3/NOPB, RefDes=RefDes, Type=TYPE
U2 U3: "3k/5kVrms, 2A/2A single-channel isolated gate driver with UVLO referenced to GND or split output 8-SOIC -40 to 125", Manufacturer_Name="Texas Instruments", Copyright="Copyright (C) 2025 Ultra Librarian. All rights reserved.", Datasheet=https://www.ti.com/lit/gpn/ucc5320, Manufacturer_Part_Number=UCC5320SCDWV, RefDes=RefDes, Type=TYPE

## Free pads (board coordinates)
  rrect50% 8.2x10 all layers, no hole: 2(4.6,5.5) 2(23,5.5) 2(41.4,5.4)

## Via types
v1: diameter 0.8, hole 0.4, Top Layer to Bottom Layer, tented both sides, 459 vias
v2: diameter 0.8, hole 0.4, Top Layer to Bottom Layer, 49 vias

## Nets (pads, with @x,y where several pads share a name; then routed paths per layer and width w, separated by ;. In a path a pad name is that pad's centre, name@x,y a point inside that pad or via, vN(x,y) a via of type N, cw(c..) or ccw(c..) an arc to the next point about the centre after c; other vN are vias at no path point)
+5V: C14.2 C15.1 C17.1 C21.1 C23.1 R3.1 U1.2 U1.4 U2.1 U3.1 | length 71.1
  Top Layer w1.016: C17.1 3,38.05 4,39.05 C15.1 ; C23.1@24.8,38.05 25.8,39.05 C21.1 ; R3.1 32.663,48.038 32.663,49.962 C14.2 32.842,50.142 32.842,54.517 U1.4 U1.2
  Layer 2 w1.016: C15.1 7,48 28.8,48 ; C21.1 28.8,48 ; v2@32.625,48 28.8,48
  Bottom Layer w0.527: v2(3.1,37.9) 4.6,37.9 5.295,37.205 U3.1 ; v2(24.8,38) 26.2,38 27.095,37.105 U2.1
  other v2: 32.6,48.1
+12V: C1.2 C6.2 C13.2 L1.1 L2.1 P3.1 R4.2 U1.3 | length 82
  Top Layer w1.016: U1.3 41.7,57.3 43.1,58.7
  Top Layer w1.27: P3.1 20.605,67.875 R4.2 39.725,67.875 43.085,64.515 43.085,60.515 C13.2 43.1,58.7 43.1,44.3 v2@39.3,40.5
  Layer 1 w1.27: v2@13.8,40.4 13.85,40.45 v2(39.2,40.45)
  other v2: 17.5,40.45 13.8,40.5 35.6,40.5
+15V_Highside: C3.2 C16.1 C18.2 C19.2 PS1.4 R1.1 R5.2 U2.5 | length 27.9
  Bottom Layer w0.527: v2(24.7,25.9) 25.5,26.7 31.9,26.7 ; U2.5 30.942,24.587 30.942,25.742 31.9,26.7 ; C18.2 31.9,26.7
  Bottom Layer w1.27: C16.1 C18.2@33.3,26.19 ; C18.2@33.35,26.7 33.86,26.19 PS1.4 40,26.09 C3.2 40.015,22.985 40.015,21 40.015,19.724 39.356,19.065 38.615,19.065 38.6,19.05 C19.2
+15V_Lowside: C5.2 C22.1 C24.2 C25.2 PS2.4 R2.1 R11.2 U3.5 | length 24.3
  Top Layer w0.527: PS2.4 20.785,26.19 21.1,25.875 R2.1
  Bottom Layer w0.527: U3.5 9.142,24.587 9.142,25.642 9.916,26.416 11.216,26.416 C22.1
  Bottom Layer w1.27: C24.2 C22.1 11.55,26.7 12.06,26.19 PS2.4 cw(c18.2,26.09) 18.3,26.09 C5.2 18.315,22.985 18.315,21.04 R11.2@18.355,21 ; C25.2 16.8,19.05 16.815,19.065 17.636,19.065 18.315,19.744 18.315,20.96 R11.2@18.355,21 ; R11.2 R11.2@18.355,21
Gate_Highside: Q1.4 R7.2 R9.2 | length 5.9
  Bottom Layer w0.384: Q1.4 28.72,15.521 28,16.241 R9.2 R7.2
Gate_Lowside: Q2.4 R13.2 R15.2 | length 5.6
  Bottom Layer w0.381: R15.2 6.9,18.625 ; Q2.4 6.92,18.605 ccw(c6.9,18.605) 6.9,18.625 ; R13.2 6.9,18.625
GND: C1.1 C2.1 C4.1 C6.1 C7.1 C8.1 C13.1 C14.1 C15.2 C17.2 C21.2 C23.2 D3.2 D4.2 P1.3 P2.3 P3.2 PS1.2 PS2.2 R10.2 R16.2 U1.1 U2.4 U3.4
  other v1: 5,32.2 6.6,32.2 8.2,32.2 9.8,32.2 11.4,32.2 13,32.2 14.6,32.2 16.2,32.2 21,32.2 22.6,32.2 24.2,32.2 25.8,32.2 27.4,32.2 29,32.2 30.6,32.2 32.2,32.2 33.8,32.2 35.4,32.2 37,32.2 38.6,32.2 2.6,33.8 4.2,33.8 5.8,33.8 7.4,33.8 9,33.8 10.6,33.8 12.2,33.8 13.8,33.8 15.4,33.8 20.2,33.8 21.8,33.8 23.4,33.8 25,33.8 26.6,33.8 28.2,33.8 29.8,33.8 31.4,33.8 33,33.8 34.6,33.8 36.2,33.8 37.8,33.8 42.6,33.8 44.2,33.8 1.8,35.4 3.4,35.4 11.4,35.4 13,35.4 14.6,35.4 16.2,35.4 21,35.4 22.6,35.4 24.2,35.4 25.8,35.4 32.2,35.4 33.8,35.4 35.4,35.4 37,35.4 41.8,35.4 43.4,35.4 9,37 10.6,37 20.2,37 21.8,37 31.4,37 42.6,37 44.2,37 9.8,38.6 21,38.6 32.2,38.6 43.4,38.6 2.6,40.2 10.6,40.2 42.6,40.2 44.2,40.2 1.8,41.8 9.8,41.8 11.4,41.8 21,41.8 22.6,41.8 24.2,41.8 32.2,41.8 33.8,41.8 43.4,41.8 2.6,43.4 12.2,43.4 13.8,43.4 15.4,43.4 17,43.4 18.6,43.4 20.2,43.4 21.8,43.4 23.4,43.4 33,43.4 34.6,43.4 36.2,43.4 37.8,43.4 39.4,43.4 44.2,43.4 9.8,45 11.4,45 13,45 14.6,45 16.2,45 17.8,45 19.4,45 21,45 22.6,45 29,45 32.2,45 33.8,45 35.4,45 37,45 38.6,45 40.2,45 2.6,46.6 7.4,46.6 10.6,46.6 12.2,46.6 13.8,46.6 15.4,46.6 17,46.6 18.6,46.6 20.2,46.6 21.8,46.6 23.4,46.6 25,46.6 31.4,46.6 33,46.6 34.6,46.6 36.2,46.6 37.8,46.6 39.4,46.6 41,46.6 1.8,48.2 3.4,48.2 5,48.2 38.6,48.2 40.2,48.2 2.6,49.8 4.2,49.8 7.4,49.8 10.6,49.8 12.2,49.8 13.8,49.8 15.4,49.8 17,49.8 18.6,49.8 20.2,49.8 21.8,49.8 23.4,49.8 25,49.8 26.6,49.8 37.8,49.8 39.4,49.8 41,49.8 1.8,51.4 3.4,51.4 5,51.4 9.8,51.4 11.4,51.4 13,51.4 14.6,51.4 16.2,51.4 17.8,51.4 19.4,51.4 21,51.4 22.6,51.4 24.2,51.4 25.8,51.4 29,51.4 35.4,51.4 37,51.4 38.6,51.4 40.2,51.4 2.6,53 4.2,53 7.4,53 10.6,53 12.2,53 13.8,53 15.4,53 17,53 18.6,53 20.2,53 21.8,53 23.4,53 25,53 26.6,53 36.2,53 37.8,53 1.8,54.6 3.4,54.6 5,54.6 9.8,54.6 11.4,54.6 13,54.6 14.6,54.6 16.2,54.6 17.8,54.6 19.4,54.6 21,54.6 22.6,54.6 24.2,54.6 25.8,54.6 29,54.6 2.6,56.2 4.2,56.2 7.4,56.2 10.6,56.2 12.2,56.2 13.8,56.2 15.4,56.2 17,56.2 18.6,56.2 20.2,56.2 21.8,56.2 23.4,56.2 25,56.2 26.6,56.2 1.8,57.8 3.4,57.8 5,57.8 9.8,57.8 11.4,57.8 13,57.8 14.6,57.8 16.2,57.8 17.8,57.8 19.4,57.8 21,57.8 22.6,57.8 24.2,57.8 25.8,57.8 29,57.8 32.2,57.8 33.8,57.8 35.4,57.8 37,57.8 2.6,59.4 4.2,59.4 7.4,59.4 10.6,59.4 12.2,59.4 13.8,59.4 15.4,59.4 17,59.4 18.6,59.4 20.2,59.4 21.8,59.4 23.4,59.4 25,59.4 26.6,59.4 31.4,59.4 33,59.4 34.6,59.4 36.2,59.4 37.8,59.4 39.4,59.4 1.8,61 3.4,61 5,61 9.8,61 11.4,61 13,61 14.6,61 16.2,61 17.8,61 19.4,61 21,61 22.6,61 25.8,61 29,61 32.2,61 33.8,61 35.4,61 37,61 38.6,61 40.2,61 2.6,62.6 4.2,62.6 7.4,62.6 10.6,62.6 12.2,62.6 13.8,62.6 15.4,62.6 17,62.6 18.6,62.6 20.2,62.6 21.8,62.6 26.6,62.6 31.4,62.6 33,62.6 34.6,62.6 36.2,62.6 37.8,62.6 39.4,62.6 41,62.6 1.8,64.2 3.4,64.2 5,64.2 9.8,64.2 11.4,64.2 13,64.2 14.6,64.2 16.2,64.2 17.8,64.2 19.4,64.2 21,64.2 22.6,64.2 29,64.2 32.2,64.2 33.8,64.2 35.4,64.2 37,64.2 38.6,64.2 40.2,64.2 2.6,65.8 4.2,65.8 13.8,65.8 15.4,65.8 34.6,65.8 36.2,65.8 37.8,65.8 39.4,65.8 44.2,65.8 1.8,67.4 3.4,67.4 5,67.4 6.6,67.4 8.2,67.4 9.8,67.4 11.4,67.4 13,67.4 14.6,67.4 16.2,67.4 17.8,67.4 43.4,67.4
GND_Highside: C3.1 C4.2 C16.2 C18.1 C20.1 D1.2 D5.1 PS1.3 U2.8
  other v1: 25.8,19.4 41.8,19.4 43.4,19.4 26.6,21 31.4,21 34.6,21 42.6,21 44.2,21 35.4,22.6 37,22.6 41.8,22.6 43.4,22.6 36.2,24.2 42.6,24.2 44.2,24.2 41.8,25.8 43.4,25.8 42.6,27.4 44.2,27.4
GND_Lowside: C5.1 C8.2 C22.2 C24.1 C26.1 D2.2 D6.1 PS2.3 U3.8
  other v1: 1.8,19.4 3.4,19.4 9.8,19.4 2.6,21 4.2,21 12.2,21 1.8,22.6 3.4,22.6 5,22.6 9.8,22.6 13,22.6 14.6,22.6 2.6,24.2 4.2,24.2 13.8,24.2 15.4,24.2 1.8,25.8 3.4,25.8 2.6,27.4 4.2,27.4 5.8,27.4 7.4,27.4 9,27.4 20.2,27.4
GNDPWR: pad.2@4.6,5.5 Q2.2
  other v1: 2.6,9.8 4.2,9.8 5.8,9.8 7.4,9.8 9,9.8 10.6,9.8 12.2,9.8 1.8,11.4 3.4,11.4 5,11.4 6.6,11.4 8.2,11.4 9.8,11.4 11.4,11.4 2.6,13 4.2,13 5.8,13 7.4,13 9,13 10.6,13 12.2,13 1.8,14.6 3.4,14.6 5,14.6
  other v2: 6.5,2.5 2.5,2.6 4.5,2.6 1.3,4 3.6,4 5.5,4 7.5,4.1 2.5,5.5 6.3,5.7 4.3,5.8 1.7,7.3 3.5,7.3 5.3,7.3 7.3,7.3
HVBUS: pad.2@41.4,5.4 Q1.1
  other v1: 39.4,9.8 41,9.8 42.6,9.8 44.2,9.8 38.6,11.4 40.2,11.4 41.8,11.4 43.4,11.4 39.4,13 41,13 42.6,13 44.2,13 41.8,14.6 43.4,14.6
  other v2: 39.9,1.8 42.7,1.8 38.7,3.6 41.2,3.6 43.8,3.8 42.5,5.6 39.9,5.7 38.7,7.4 41.1,7.4 43.6,7.4
NetC2_2: C2.2 L1.2 PS1.1 | length 8
  Bottom Layer w1.27: C2.2 35.6,37.51 35.615,37.525 39.175,37.525 L1.2 39.735,37.55 39.9,37.385 PS1.1
NetC7_2: C7.2 L2.2 PS2.1 | length 8.1
  Bottom Layer w1.27: C7.2 13.8,37.51 13.815,37.525 17.475,37.525 L2.2 18.035,37.55 18.2,37.385 PS2.1
NetD1_1: D1.1 R1.2 | length 2.1
  Top Layer w0.527: D1.1 R1.2
NetD2_1: D2.1 R2.2 | length 2.1
  Top Layer w0.527: D2.1 R2.2
NetD3_1: D3.1 R3.2 | length 2.1
  Top Layer w1.016: R3.2 34.4,47.975 36.475,47.975 D3.1
NetD4_1: D4.1 R4.1 | length 3.1
  Top Layer w1.27: D4.1 R4.1
NetR6_2: R6.2 U2.2 | length 3.9
  Bottom Layer w0.527: R6.2 28.053,39.125 28.365,38.813 U2.2
NetR7_1: R7.1 U2.6 | length 4.4
  Bottom Layer w0.527: U2.6 29.635,20.686 29.947,20.375 R7.1
NetR8_2: R8.2 U2.3 | length 3.9
  Bottom Layer w0.527: U2.3 29.635,38.813 29.947,39.125 R8.2
NetR9_1: R9.1 U2.7 | length 4.4
  Bottom Layer w0.527: R9.1 28.053,20.375 28.365,20.686 U2.7
NetR12_2: R12.2 U3.2 | length 3.9
  Bottom Layer w0.527: R12.2 6.254,39.125 6.565,38.813 U3.2
NetR13_1: R13.1 U3.6 | length 4.4
  Bottom Layer w0.527: U3.6 7.835,20.686 8.147,20.375 R13.1
NetR14_2: R14.2 U3.3 | length 3.9
  Bottom Layer w0.527: U3.3 7.835,38.813 8.147,39.125 R14.2
NetR15_1: R15.1 U3.7 | length 4.4
  Bottom Layer w0.527: R15.1 6.254,20.375 6.565,20.686 U3.7
PWM_Highside_N: P1.2 R8.1 R10.1 | length 25
  Bottom Layer w0.384: R8.1 R10.1@30,43.3 ; R10.1 30.125,65.023 30.5,65.398 P1.2
PWM_Highside_P: P1.1 R6.1 | length 24.8
  Bottom Layer w0.384: P1.1 27.96,40.915 R6.1
PWM_Lowside_N: P2.2 R14.1 R16.1 | length 25
  Bottom Layer w0.384: R14.1 R16.1@8.2,43.5 ; R16.1 8.7,43.875 P2.2
PWM_Lowside_P: P2.1 R12.1 | length 24.8
  Bottom Layer w0.384: R12.1@6.18,40.895 P2.1@6.18,65.68
  Bottom Layer w0.527: P2.1 P2.1@6.18,65.68 ; R12.1@6.18,40.895 R12.1
Source_Highside: C19.1 C20.2 D5.2 Q1.3 R5.1 | length 12.1
  Bottom Layer w0.384: Q1.3 34.142,17.882 34.142,18.542 C20.2
  Bottom Layer w1.27: C20.2 35.8,19 ; C19.1 35.8,19 ; R5.1 D5.2 36.075,19.275 35.8,19
Source_Lowside: C25.1 C26.2 D6.2 Q2.3 R11.1 | length 12.3
  Bottom Layer w0.384: Q2.3 9.5,15 12.342,17.842 12.342,18.542 C26.2
  Bottom Layer w1.27: C26.2 14,19 ; C25.1 14,19 ; R11.1 D6.2 14.175,19.175 14,19
SW: pad.2@23,5.5 Q1.2 Q2.1
  other v1: 17,9.8 18.6,9.8 20.2,9.8 21.8,9.8 23.4,9.8 25,9.8 26.6,9.8 28.2,9.8 29.8,9.8 31.4,9.8 33,9.8 34.6,9.8 16.2,11.4 17.8,11.4 19.4,11.4 21,11.4 22.6,11.4 24.2,11.4 25.8,11.4 27.4,11.4 29,11.4 30.6,11.4 32.2,11.4 33.8,11.4 17,13 18.6,13 20.2,13 21.8,13 23.4,13 25,13 26.6,13 28.2,13 29.8,13 31.4,13 33,13 34.6,13 19.4,14.6 21,14.6 22.6,14.6 24.2,14.6 25.8,14.6
  other v2: 20.8,2.1 22.8,2.1 25,2.2 19.7,3.5 21.7,3.5 23.7,3.5 25.8,3.5 20.7,4.8 22.8,4.8 24.8,4.9 19.8,6.3 21.7,6.3 23.6,6.3 25.8,6.4 21.1,7.7 22.8,7.7 24.4,7.7
pads on no net: MP1.1 MP2.1 MP3.1 MP4.1

## Polygon pours and split planes (outlines as drawn)
GND_Highside on Top Layer "GND_HIGHSIDE_L01_P008" (solid, pour order 8): 45.5,28.5 ccw(c44.5,28.5) 44.5,29.5 24.7,29.5 ccw(c24.7,28.5) 23.7,28.5 23.7,18.9 ccw(c24.9,18.9) 24.9,17.7 43.7,17.7 ccw(c43.7,19.5) 45.5,19.5
GND_Lowside on Top Layer "GND_LOWSIDE_L01_P004" (solid, pour order 4): 0.5,19.2 0.5,28.2 cw(c1.8,28.2) 1.8,29.5 20.9,29.5 cw(c20.9,28.3) 22.1,28.3 22.1,19.1 cw(c20.7,19.1) 20.7,17.7 2,17.7 cw(c2,19.2)
GND on Top Layer "GND_L01_P000" (solid, pour order 0): 0.5,68.5 cw(c1.5,68.5) 1.5,69.5 44.5,69.5 cw(c44.5,68.5) 45.5,68.5 45.5,31 cw(c45,31) 45,30.5 1.3,30.5 cw(c1.3,31.3) 0.5,31.3
GNDPWR on Top Layer "GNDPWR_L01_P021" (solid, pour order 21): 7.3,0.5 ccw(c7.3,1.9) 8.7,1.9 8.7,7.4 cw(c10.1,7.4) 10.1,8.8 12.5,8.8 ccw(c12.5,9.5) 13.2,9.5 13.2,15.4 ccw(c12.1,15.4) 12.1,16.5 1.5,16.5 ccw(c1.5,15.5) 0.5,15.5 0.5,1.3 ccw(c1.3,1.3) 1.3,0.5
SW on Top Layer "SW_L01_P017" (solid, pour order 17): 25.9,0.5 ccw(c25.9,1.7) 27.1,1.7 27.1,7.4 cw(c28.5,7.4) 28.5,8.8 34,8.8 ccw(c34,9.8) 35,9.8 35,15.5 ccw(c34,15.5) 34,16.5 16.4,16.5 ccw(c16.4,15.6) 15.5,15.6 15.5,9.8 ccw(c16.5,9.8) 16.5,8.8 17.8,8.8 cw(c17.8,7.8) 18.8,7.8 18.8,1.7 ccw(c20,1.7) 20,0.5
HVBUS on Top Layer "HVBUS_L01_P012" (solid, pour order 12): 44.5,0.5 ccw(c44.5,1.5) 45.5,1.5 45.5,15.5 ccw(c44.5,15.5) 44.5,16.5 38,16.5 ccw(c38,15.7) 37.2,15.7 37.2,1.8 ccw(c38.5,1.8) 38.5,0.5
GNDPWR on Bottom Layer "GNDPWR_L04_P023" (solid, pour order 23): 7.3,0.5 ccw(c7.3,1.9) 8.7,1.9 8.7,7.4 cw(c10.1,7.4) 10.1,8.8 12.5,8.8 ccw(c12.5,9.5) 13.2,9.5 13.2,15.4 ccw(c12.1,15.4) 12.1,16.5 1.5,16.5 ccw(c1.5,15.5) 0.5,15.5 0.5,1.3 ccw(c1.3,1.3) 1.3,0.5
SW on Bottom Layer "SW_L04_P019" (solid, pour order 19): 25.9,0.5 ccw(c25.9,1.7) 27.1,1.7 27.1,7.4 cw(c28.5,7.4) 28.5,8.8 34,8.8 ccw(c34,9.8) 35,9.8 35,15.5 ccw(c34,15.5) 34,16.5 16.4,16.5 ccw(c16.4,15.6) 15.5,15.6 15.5,9.8 ccw(c16.5,9.8) 16.5,8.8 17.8,8.8 cw(c17.8,7.8) 18.8,7.8 18.8,1.7 ccw(c20,1.7) 20,0.5
GND_Highside on Bottom Layer "GND_HIGHSIDE_L04_P010" (solid, pour order 10): 45.5,28.5 ccw(c44.5,28.5) 44.5,29.5 24.7,29.5 ccw(c24.7,28.5) 23.7,28.5 23.7,18.9 ccw(c24.9,18.9) 24.9,17.7 43.7,17.7 ccw(c43.7,19.5) 45.5,19.5
GND_Lowside on Bottom Layer "GND_LOWSIDE_L04_P006" (solid, pour order 6): 0.5,19.2 0.5,28.2 cw(c1.8,28.2) 1.8,29.5 20.9,29.5 cw(c20.9,28.3) 22.1,28.3 22.1,19.1 cw(c20.7,19.1) 20.7,17.7 2,17.7 cw(c2,19.2)
GND on Bottom Layer "GND_L04_P001" (solid, pour order 1): 0.5,68.5 cw(c1.5,68.5) 1.5,69.5 44.5,69.5 cw(c44.5,68.5) 45.5,68.5 45.5,31 cw(c45,31) 45,30.5 1.3,30.5 cw(c1.3,31.3) 0.5,31.3
HVBUS on Bottom Layer "HVBUS_L04_P014" (solid, pour order 14): 44.5,0.5 ccw(c44.5,1.5) 45.5,1.5 45.5,15.5 ccw(c44.5,15.5) 44.5,16.5 38,16.5 ccw(c38,15.7) 37.2,15.7 37.2,1.8 ccw(c38.5,1.8) 38.5,0.5
GNDPWR on Layer 1 "GNDPWR_L02_P022" (solid, pour order 22): 7.3,0.5 ccw(c7.3,1.9) 8.7,1.9 8.7,7.4 cw(c10.1,7.4) 10.1,8.8 12.5,8.8 ccw(c12.5,9.5) 13.2,9.5 13.2,15.4 ccw(c12.1,15.4) 12.1,16.5 1.5,16.5 ccw(c1.5,15.5) 0.5,15.5 0.5,1.3 ccw(c1.3,1.3) 1.3,0.5
SW on Layer 1 "SW_L02_P018" (solid, pour order 18): 25.9,0.5 ccw(c25.9,1.7) 27.1,1.7 27.1,7.4 cw(c28.5,7.4) 28.5,8.8 34,8.8 ccw(c34,9.8) 35,9.8 35,15.5 ccw(c34,15.5) 34,16.5 16.4,16.5 ccw(c16.4,15.6) 15.5,15.6 15.5,9.8 ccw(c16.5,9.8) 16.5,8.8 17.8,8.8 cw(c17.8,7.8) 18.8,7.8 18.8,1.7 ccw(c20,1.7) 20,0.5
HVBUS on Layer 1 "HVBUS_L02_P013" (solid, pour order 13): 44.5,0.5 ccw(c44.5,1.5) 45.5,1.5 45.5,15.5 ccw(c44.5,15.5) 44.5,16.5 38,16.5 ccw(c38,15.7) 37.2,15.7 37.2,1.8 ccw(c38.5,1.8) 38.5,0.5
GND_Highside on Layer 1 "GND_HIGHSIDE_L02_P009" (solid, pour order 9): 45.5,28.5 ccw(c44.5,28.5) 44.5,29.5 24.7,29.5 ccw(c24.7,28.5) 23.7,28.5 23.7,18.9 ccw(c24.9,18.9) 24.9,17.7 43.7,17.7 ccw(c43.7,19.5) 45.5,19.5
GND_Lowside on Layer 1 "GND_LOWSIDE_L02_P005" (solid, pour order 5): 0.5,19.2 0.5,28.2 cw(c1.8,28.2) 1.8,29.5 20.9,29.5 cw(c20.9,28.3) 22.1,28.3 22.1,19.1 cw(c20.7,19.1) 20.7,17.7 2,17.7 cw(c2,19.2)
GND on Layer 1 "GND_L02_P002" (solid, pour order 2): 0.5,68.5 cw(c1.5,68.5) 1.5,69.5 44.5,69.5 cw(c44.5,68.5) 45.5,68.5 45.5,31 cw(c45,31) 45,30.5 1.3,30.5 cw(c1.3,31.3) 0.5,31.3
GND on Layer 2 "GND_L03_P003" (solid, pour order 3): 0.5,68.5 cw(c1.5,68.5) 1.5,69.5 44.5,69.5 cw(c44.5,68.5) 45.5,68.5 45.5,31 cw(c45,31) 45,30.5 1.3,30.5 cw(c1.3,31.3) 0.5,31.3
GNDPWR on Layer 2 "GNDPWR_L03_P024" (solid, pour order 24): 7.3,0.5 ccw(c7.3,1.9) 8.7,1.9 8.7,7.4 cw(c10.1,7.4) 10.1,8.8 12.5,8.8 ccw(c12.5,9.5) 13.2,9.5 13.2,15.4 ccw(c12.1,15.4) 12.1,16.5 1.5,16.5 ccw(c1.5,15.5) 0.5,15.5 0.5,1.3 ccw(c1.3,1.3) 1.3,0.5
SW on Layer 2 "SW_L03_P020" (solid, pour order 20): 25.9,0.5 ccw(c25.9,1.7) 27.1,1.7 27.1,7.4 cw(c28.5,7.4) 28.5,8.8 34,8.8 ccw(c34,9.8) 35,9.8 35,15.5 ccw(c34,15.5) 34,16.5 16.4,16.5 ccw(c16.4,15.6) 15.5,15.6 15.5,9.8 ccw(c16.5,9.8) 16.5,8.8 17.8,8.8 cw(c17.8,7.8) 18.8,7.8 18.8,1.7 ccw(c20,1.7) 20,0.5
HVBUS on Layer 2 "HVBUS_L03_P015" (solid, pour order 15): 44.5,0.5 ccw(c44.5,1.5) 45.5,1.5 45.5,15.5 ccw(c44.5,15.5) 44.5,16.5 38,16.5 ccw(c38,15.7) 37.2,15.7 37.2,1.8 ccw(c38.5,1.8) 38.5,0.5
GND_Highside on Layer 2 "GND_HIGHSIDE_L03_P011" (solid, pour order 11): 45.5,28.5 ccw(c44.5,28.5) 44.5,29.5 24.7,29.5 ccw(c24.7,28.5) 23.7,28.5 23.7,18.9 ccw(c24.9,18.9) 24.9,17.7 43.7,17.7 ccw(c43.7,19.5) 45.5,19.5
GND_Lowside on Layer 2 "GND_LOWSIDE_L03_P007" (solid, pour order 7): 0.5,19.2 0.5,28.2 cw(c1.8,28.2) 1.8,29.5 20.9,29.5 cw(c20.9,28.3) 22.1,28.3 22.1,19.1 cw(c20.7,19.1) 20.7,17.7 2,17.7 cw(c2,19.2)

## Keep-outs
Keep-Out Layer:
  lines w0.254: 10.2,8 ccw(c10.2,7) 9.2,7 9.2,1 cw(c8.2,1) 8.2,0 1,0 cw(c1,1) 0,1 0,69 cw(c1,69) 1,70 44,70 45,70 cw(c45,69) 46,69 46,1 cw(c45,1) 45,0 37.8,0 cw(c37.8,1) 36.8,1 36.8,7 ccw(c35.8,7) 35.8,8 28.6,8 ; 10.2,8 10.2,8 ; 10.2,8 17.4,8 cw(c17.4,7) 18.4,7 18.4,1 ccw(c19.4,1) 19.4,0 26.6,0 ccw(c26.6,1) 27.6,1 27.6,7 cw(c28.6,7) 28.6,8 ; 28.6,8 28.6,8

## Silkscreen, mask and mechanical layers (free items; w line width, h text height)
Top Overlay:
  drawing of 2 lines, arcs and shapes, not listed
  text "12V" at 19.046,59.654 h1 r90
  text "GND" at 21.646,59.554 h1 r90
  text "GND" at 11.446,59.354 h1 r90
  text "GND" at 33.346,59.054 h1 r90
  text "PWM+" at 6.846,58.854 h1 r90
  text "PWM-" at 9.146,58.754 h1 r90
  text "PWM+" at 28.746,58.554 h1 r90
  text "PWM-" at 31.046,58.454 h1 r90
  text "AESK" at 10.154,47.054 h1.2
  text "Highside" at 33.754,43.287 h1
  text "Lowside" at 12.254,43.154 h1
Bottom Overlay:
  drawing of 15 lines, arcs and shapes, not listed
  text "12V" at 18.154,57.554 h1 r270
  text "GND" at 20.154,57.454 h1 r270
  text "PWM+" at 27.354,57.354 h1 r270
  text "GND" at 32.954,57.254 h1 r270
  text "PWM-" at 30.054,57.154 h1 r270
  text "GND" at 10.354,57.054 h1 r270
  text "PWM-" at 8.054,56.954 h1 r270
  text "PWM+" at 5.454,56.854 h1 r270
  text "TO-247-4 MOSFET" at 42.146,52.154 h1
  text "Board" at 42.246,50.154 h1

## Text inside footprints (layer, text, board x,y; h text height)
C15: Top Overlay "+" at 6.05,44.5 h1
C21: Top Overlay "+" at 27.85,44.5 h1
PS1: Bottom Overlay "GND" at 38.176,34.607 h0.76 r90; Bottom Overlay "Vin" at 38.169,32.034 h0.76 r90; Bottom Overlay "+Vo" at 38.184,27.07 h0.76 r90; Bottom Overlay "0V" at 38.166,29.192 h0.76 r90
PS2: Bottom Overlay "GND" at 16.476,34.607 h0.76 r90; Bottom Overlay "Vin" at 16.469,32.034 h0.76 r90; Bottom Overlay "+Vo" at 16.484,27.07 h0.76 r90; Bottom Overlay "0V" at 16.466,29.192 h0.76 r90